# Altium PCB 风火轮（单面）.PcbDoc (part 4 of 4)
Units mil, origin at the board's own origin, x right, y up, seen from the top; angles counter-clockwise.
Board outline 3937.01 x 3937.01 mil, 2 copper layers (Top Layer, Bottom Layer); 108 components, 81 nets, 448 pads, 132 vias.
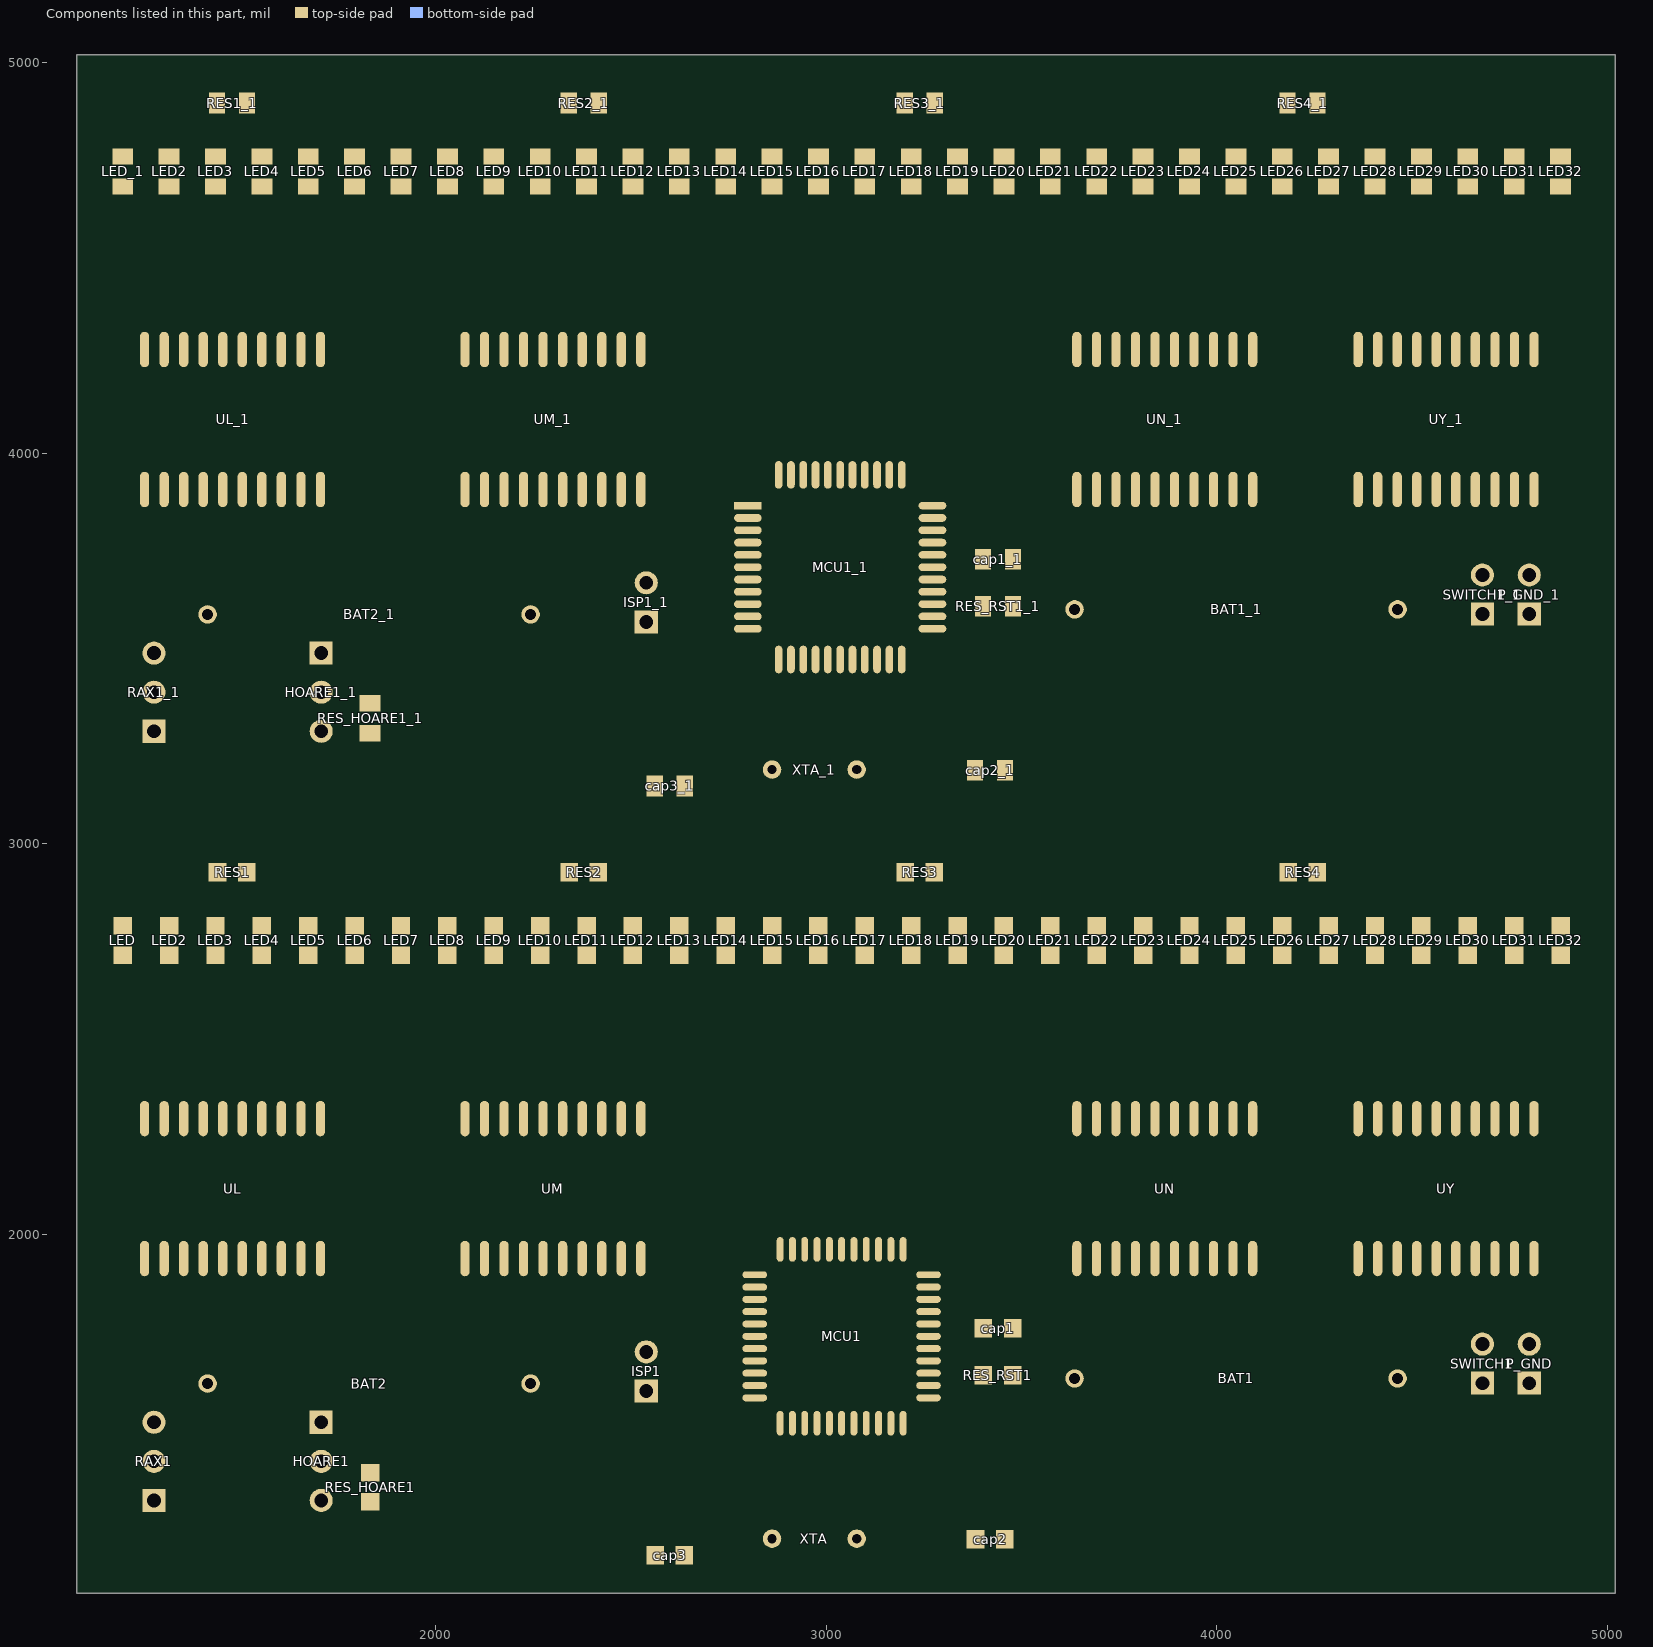
[diagram p4: the components of this part, seen from the top]

## Via types
v1: diameter 50, hole 28, Top Layer to Bottom Layer, 132 vias

## Nets (pads, with @x,y where several pads share a name; then routed paths per layer and width w, separated by ;. In a path a pad name is that pad's centre, name@x,y a point inside that pad or via, vN(x,y) a via of type N, cw(c..) or ccw(c..) an arc to the next point about the centre after c; other vN are vias at no path point) (continued)
copper on no net: (continued)
  Bottom Layer w20: 1387.62,3543.88 2138.69,3543.88 2225.93,3631.13 2294.05,3631.13 2362.14,3699.22 2362.14,3726.5 v1(2377.14,3741.5) ; 1401,3661.5 2281.62,3661.13 2332.14,3711.65 2332.14,3810.5 2326,3816.65 v1(2326,3825.5) ; 1435,3703.5 1444,3694.5 ; v1(1459,4011.5) 1459,4001.65 1455.86,3998.5 1508.86,3945.5 2182.57,3945.5 2272.57,3855.5 2272.57,3741.93 v1(2275,3739.5) ; v1(1504,4070.5) 1504,4079.5 v1@1509,4084.5 ; 1616.66,3492.5 1670.19,3438.98 1745.81,3438.98 1818.34,3511.5 2189.57,3511.5 v1@2190.57,3512.5 ; v1@1712,4360.5 v1(1712,4369.5) ; v1@1925,3771.5 v1@1925,3783.5 ; v1@2161,3732.5 v1(2171,3742.5) ; 2188,3694.5 2227.57,3734.08 v1(2227.57,3810.5) ; v1(2625,3958.5) 2733.87,4067.38 2900.13,4067.38 2987,3980.5 ; v1@2712,3913.5 v1(2715,3916.5) ; v1(2855.13,4022.38) 2937,3940.5 3668.07,3940.5 3892,3716.57 v1(3892,3663.5) ; v1(2887,3765.5) v1@2898,3746.5 ; v1(2896,3857.5) 2947.36,3857.5 2991.36,3901.5 3664.64,3901.5 3842,3724.14 3842,3628.5 v1(3838,3632.5) v1@3838,3654.5 ; v1(2950,3797.5) 3641.36,3797.5 3777.36,3661.5 v1@3792,3661.5 ; 3517,3746.5 3532,3765.5 v1(3546,3751.5) ; v1@3686,4044.5 v1(3692,4038.5) ; 3963,3980.5 v1(3992,3984.5) ; v1(4668.43,4053.78) v1@4668.43,4055.93 ; v1@4826,3426.5 4882,3482.5 ; v1@1474,4011.5 ccw(c1549.19,4011.5) 1496.02,3958.34 ; v1@1474,4011.5 ccw(c1549.19,4011.5) 1496.02,3958.34 ; v1@1474,4011.5 ccw(c1549.19,4011.5) 1496.02,3958.34 ; v1@1474,4011.5 ccw(c1549.19,4011.5) 1496.02,3958.34 ; 2150.89,3511.5 cw(c2150.89,3451.39) v1@2193.39,3493.9 ; 2150.89,3511.5 cw(c2150.89,3451.39) v1@2193.39,3493.9 ; 2150.89,3511.5 cw(c2150.89,3451.39) v1@2193.39,3493.9 ; 2150.89,3511.5 cw(c2150.89,3451.39) v1@2193.39,3493.9 ; v1@2216.96,3799.9 cw(c2191.36,3774.29) 2227.57,3774.29 ; v1@2216.96,3799.9 cw(c2191.36,3774.29) 2227.57,3774.29 ; v1@2216.96,3799.9 cw(c2191.36,3774.29) 2227.57,3774.29 ; v1@2216.96,3799.9 cw(c2191.36,3774.29) 2227.57,3774.29 ; 2227.57,3774.29 cw(c2263.78,3774.29) v1@2238.18,3799.9 ; 2227.57,3774.29 cw(c2263.78,3774.29) v1@2238.18,3799.9 ; 2227.57,3774.29 cw(c2263.78,3774.29) v1@2238.18,3799.9 ; 2227.57,3774.29 cw(c2263.78,3774.29) v1@2238.18,3799.9 ; v1@2264.39,3750.11 ccw(c2244.65,3769.85) 2272.57,3769.85 ; v1@2264.39,3750.11 ccw(c2244.65,3769.85) 2272.57,3769.85 ; v1@2264.39,3750.11 ccw(c2244.65,3769.85) 2272.57,3769.85 ; v1@2264.39,3750.11 ccw(c2244.65,3769.85) 2272.57,3769.85 ; 2272.57,3781.58 ccw(c2317.08,3781.58) v1@2285.61,3750.11 ; 2272.57,3781.58 ccw(c2317.08,3781.58) v1@2285.61,3750.11 ; 2272.57,3781.58 ccw(c2317.08,3781.58) v1@2285.61,3750.11 ; 2272.57,3781.58 ccw(c2317.08,3781.58) v1@2285.61,3750.11 ; v1@2315.39,3814.9 cw(c2274.96,3774.46) 2332.14,3774.46 ; v1@2315.39,3814.9 cw(c2274.96,3774.46) 2332.14,3774.46 ; v1@2315.39,3814.9 cw(c2274.96,3774.46) 2332.14,3774.46 ; v1@2315.39,3814.9 cw(c2274.96,3774.46) 2332.14,3774.46 ; 2362.14,3696.64 cw(c2395.69,3696.64) v1@2382.87,3727.64 ; 2362.14,3696.64 cw(c2395.69,3696.64) v1@2382.87,3727.64 ; 2362.14,3696.64 cw(c2395.69,3696.64) v1@2382.87,3727.64 ; 2362.14,3696.64 cw(c2395.69,3696.64) v1@2382.87,3727.64 ; v1@2625,3973.5 ccw(c2625,4009.72) 2650.61,3984.11 ; v1@2625,3973.5 ccw(c2625,4009.72) 2650.61,3984.11 ; v1@2625,3973.5 ccw(c2625,4009.72) 2650.61,3984.11 ; v1@2625,3973.5 ccw(c2625,4009.72) 2650.61,3984.11 ; v1@2640,3958.5 cw(c2676.21,3958.5) 2650.61,3984.11 ; v1@2640,3958.5 cw(c2676.21,3958.5) 2650.61,3984.11 ; v1@2640,3958.5 cw(c2676.21,3958.5) 2650.61,3984.11 ; v1@2640,3958.5 cw(c2676.21,3958.5) 2650.61,3984.11 ; v1@2855.13,4007.38 cw(c2855.13,3971.16) 2880.73,3996.77 ; v1@2855.13,4007.38 cw(c2855.13,3971.16) 2880.73,3996.77 ; v1@2855.13,4007.38 cw(c2855.13,3971.16) 2880.73,3996.77 ; v1@2855.13,4007.38 cw(c2855.13,3971.16) 2880.73,3996.77 ; v1@2870.13,4022.38 ccw(c2906.34,4022.38) 2880.73,3996.77 ; v1@2870.13,4022.38 ccw(c2906.34,4022.38) 2880.73,3996.77 ; v1@2870.13,4022.38 ccw(c2906.34,4022.38) 2880.73,3996.77 ; v1@2870.13,4022.38 ccw(c2906.34,4022.38) 2880.73,3996.77 ; v1@2906.61,3846.9 cw(c2932.21,3821.29) 2932.21,3857.5 ; v1@2906.61,3846.9 cw(c2932.21,3821.29) 2932.21,3857.5 ; v1@2906.61,3846.9 cw(c2932.21,3821.29) 2932.21,3857.5 ; v1@2906.61,3846.9 cw(c2932.21,3821.29) 2932.21,3857.5 ; v1@2906.61,3868.11 ccw(c2932.21,3893.72) 2932.21,3857.5 ; v1@2906.61,3868.11 ccw(c2932.21,3893.72) 2932.21,3857.5 ; v1@2906.61,3868.11 ccw(c2932.21,3893.72) 2932.21,3857.5 ; v1@2906.61,3868.11 ccw(c2932.21,3893.72) 2932.21,3857.5 ; v1@2960.61,3786.9 cw(c2986.21,3761.29) 2986.21,3797.5 ; v1@2960.61,3786.9 cw(c2986.21,3761.29) 2986.21,3797.5 ; v1@2960.61,3786.9 cw(c2986.21,3761.29) 2986.21,3797.5 ; v1@2960.61,3786.9 cw(c2986.21,3761.29) 2986.21,3797.5 ; v1@2960.61,3808.11 ccw(c2986.21,3833.72) 2986.21,3797.5 ; v1@2960.61,3808.11 ccw(c2986.21,3833.72) 2986.21,3797.5 ; v1@2960.61,3808.11 ccw(c2986.21,3833.72) 2986.21,3797.5 ; v1@2960.61,3808.11 ccw(c2986.21,3833.72) 2986.21,3797.5 ; 3748.47,3690.39 ccw(c3782,3723.92) v1@3782,3676.5 ; 3748.47,3690.39 ccw(c3782,3723.92) v1@3782,3676.5 ; 3748.47,3690.39 ccw(c3782,3723.92) v1@3782,3676.5 ; 3748.47,3690.39 ccw(c3782,3723.92) v1@3782,3676.5 ; 3759.67,3679.19 cw(c3741.99,3661.5) v1@3767,3661.5 ; 3759.67,3679.19 cw(c3741.99,3661.5) v1@3767,3661.5 ; 3759.67,3679.19 cw(c3741.99,3661.5) v1@3767,3661.5 ; 3759.67,3679.19 cw(c3741.99,3661.5) v1@3767,3661.5 ; v1@3827.39,3643.11 ccw(c3792.13,3678.37) 3842,3678.37 ; v1@3827.39,3643.11 ccw(c3792.13,3678.37) 3842,3678.37 ; v1@3827.39,3643.11 ccw(c3792.13,3678.37) 3842,3678.37 ; v1@3827.39,3643.11 ccw(c3792.13,3678.37) 3842,3678.37 ; 3842,3659.06 ccw(c3864.56,3659.06) v1@3848.61,3643.11 ; 3842,3659.06 ccw(c3864.56,3659.06) v1@3848.61,3643.11 ; 3842,3659.06 ccw(c3864.56,3659.06) v1@3848.61,3643.11 ; 3842,3659.06 ccw(c3864.56,3659.06) v1@3848.61,3643.11 ; v1@3881.39,3674.11 ccw(c3855.79,3699.72) 3892,3699.72 ; v1@3881.39,3674.11 ccw(c3855.79,3699.72) 3892,3699.72 ; v1@3881.39,3674.11 ccw(c3855.79,3699.72) 3892,3699.72 ; v1@3881.39,3674.11 ccw(c3855.79,3699.72) 3892,3699.72 ; 3892,3699.72 ccw(c3928.21,3699.72) v1@3902.61,3674.11 ; 3892,3699.72 ccw(c3928.21,3699.72) v1@3902.61,3674.11 ; 3892,3699.72 ccw(c3928.21,3699.72) v1@3902.61,3674.11 ; 3892,3699.72 ccw(c3928.21,3699.72) v1@3902.61,3674.11 ; v1@4816,3446.5 ccw(c4816,3518.93) 4867.21,3467.72 ; v1@4816,3446.5 ccw(c4816,3518.93) 4867.21,3467.72 ; v1@4816,3446.5 ccw(c4816,3518.93) 4867.21,3467.72 ; v1@4816,3446.5 ccw(c4816,3518.93) 4867.21,3467.72
  Bottom Layer w24: 1444,3694.5 2188,3694.5
  Bottom Layer w25: 1708,3288.5 1708,3213.5 1824,3097.5 ; 1695.96,3276.46 cw(c1666.89,3247.4) 1708,3247.4 ; 1695.96,3276.46 cw(c1666.89,3247.4) 1708,3247.4 ; 1695.96,3276.46 cw(c1666.89,3247.4) 1708,3247.4 ; 1695.96,3276.46 cw(c1666.89,3247.4) 1708,3247.4 ; 1708,3247.4 cw(c1749.11,3247.4) 1720.04,3276.46 ; 1708,3247.4 cw(c1749.11,3247.4) 1720.04,3276.46 ; 1708,3247.4 cw(c1749.11,3247.4) 1720.04,3276.46 ; 1708,3247.4 cw(c1749.11,3247.4) 1720.04,3276.46
  Bottom Layer w30: 1114,4233.5 1114,3250.5 1261,3103.5 v1(1695,3103.5) ; 1119.29,4238.22 1119.29,4239.64 1249.15,4369.5 v1@1692.97,4369.5 ; 1300,4074.5 1300,3838.5 1435,3703.5 ; 1302,4074.5 1314,4086.5 v1(1407,4086.5) ; v1(1359,4018.5) 1359,4002.5 1355,3998.5 1621,3732.5 v1@2161,3732.5 ; 1387.62,3543.88 1196,3735.5 1196,4164.5 1311,4279.5 1519.43,4279.5 1556.71,4242.22 1556.71,3998.5 v1(1559,3998.5) ; 1401,3661.5 1246,3816.5 1246,4143.5 1342,4239.5 1455,4239.5 1504,4190.5 v1@1504,4079.5 ; v1(1608,4038.5) 1608,4285.5 1566,4327.5 1276,4327.5 1156,4207.5 1156,3701.5 1365,3492.5 1616.66,3492.5 ; 1708,3388.5 2386.43,3388.5 2534.43,3240.5 3377.57,3240.5 3569.57,3432.5 4226.24,3432.5 4536.77,3743.03 4702.59,3743.03 4757.11,3688.5 ; v1@1741,4029.5 1776,3994.5 2282,3994.5 v1(2502,3774.5) 2502,3995.5 2711,4204.5 3983.46,4204.5 v1@4052.28,4103.78 ; 1824,3097.5 4189,3097.5 4680,3588.5 ; v1@1925,3783.5 v1(1925,3894.5) ; v1(1926,4045.5) 2222,4045.5 v1(2528,4351.5) ; v1(2064,4388.5) v1@2064,4966.5 ; 2244,3587.5 2551,3280.5 3361,3280.5 3636.23,3555.73 3636.23,3600.5 ; v1(2416,3206.5) 2446,3176.5 v1(2739,3176.5) ; v1@2443,3506.5 2551.5,3398 2736.5,3398 2835,3496.5 2835,3561.5 2962,3688.5 3063,3688.5 3084,3667.5 v1(3084,3570.5) ; v1(2591,3834.5) 2729,3834.5 2862,3701.5 ; v1@2712,3913.5 2698,3899.5 2600,3899.5 2564,3935.5 2564,3976.5 2689.87,4102.38 3962.77,4102.38 4140.64,3924.5 4537,3924.5 v1@4671.28,4058.78 ; v1(2789,3333.5) 2940,3333.5 3029,3422.5 3029,3620.5 v1(3021,3628.5) ; v1@2898,3746.5 3517,3746.5 ; 2987,3980.5 3963,3980.5 ; v1(3010,3856.5) 3646,3856.5 v1(3742,3760.5) ; v1(3035,4044.5) v1@3686,4044.5 ; v1(3166,3584.5) 3364,3386.5 3376,3386.5 ; v1(3545,3315.5) v1(4146,3315.5) ; v1@3576,4329.5 v1@3576,4979.5 ; v1(3577,4979.5) 3577,4985.5 v1@3581,4985.5 ; v1(3599,3368.5) v1(4007,3368.5) ; v1(3992,3984.5) 4124,3877.5 4577,3877.5 v1(4711,4011.5) ; v1@4062,4113.5 4680.2,4113.5 4756,4037.7 ; v1(4092,4356.5) 4189,4356.5 4382,4163.5 4851,4163.5 4851,4164.5 4882,4133.5 4882,3482.5 ; v1@4266,4971.5 4266,4393.5 v1@4353,4306.5 ; v1(4825,4373.5) 4947,4251.5 4947,3448.5 v1@4826,3327.5 ; v1@1369,4018.5 ccw(c1451.08,4018.5) 1393.04,3960.46 ; v1@1369,4018.5 ccw(c1451.08,4018.5) 1393.04,3960.46 ; v1@1369,4018.5 ccw(c1451.08,4018.5) 1393.04,3960.46 ; v1@1369,4018.5 ccw(c1451.08,4018.5) 1393.04,3960.46 ; 1556.71,4028.16 ccw(c1588.66,4028.16) v1@1566.07,4005.58 ; 1556.71,4028.16 ccw(c1588.66,4028.16) v1@1566.07,4005.58 ; 1556.71,4028.16 ccw(c1588.66,4028.16) v1@1566.07,4005.58 ; 1556.71,4028.16 ccw(c1588.66,4028.16) v1@1566.07,4005.58 ; 1718.27,3378.23 cw(c1743.07,3353.43) 1743.07,3388.5 ; 1718.27,3378.23 cw(c1743.07,3353.43) 1743.07,3388.5 ; 1718.27,3378.23 cw(c1743.07,3353.43) 1743.07,3388.5 ; 1718.27,3378.23 cw(c1743.07,3353.43) 1743.07,3388.5 ; 1718.27,3398.78 ccw(c1743.07,3423.58) 1743.07,3388.5 ; 1718.27,3398.78 ccw(c1743.07,3423.58) 1743.07,3388.5 ; 1718.27,3398.78 ccw(c1743.07,3423.58) 1743.07,3388.5 ; 1718.27,3398.78 ccw(c1743.07,3423.58) 1743.07,3388.5 ; v1@1739,4017.5 cw(c1739,3983.7) 1762.9,4007.6 ; v1@1739,4017.5 cw(c1739,3983.7) 1762.9,4007.6 ; v1@1739,4017.5 cw(c1739,3983.7) 1762.9,4007.6 ; v1@1739,4017.5 cw(c1739,3983.7) 1762.9,4007.6 ; v1@1913.93,3790.58 ccw(c1887.2,3817.3) 1925,3817.3 ; v1@1913.93,3790.58 ccw(c1887.2,3817.3) 1925,3817.3 ; v1@1913.93,3790.58 ccw(c1887.2,3817.3) 1925,3817.3 ; v1@1913.93,3790.58 ccw(c1887.2,3817.3) 1925,3817.3 ; v1@2052.93,4959.43 cw(c2026.2,4932.7) 2064,4932.7 ; v1@2052.93,4959.43 cw(c2026.2,4932.7) 2064,4932.7 ; v1@2052.93,4959.43 cw(c2026.2,4932.7) 2064,4932.7 ; v1@2052.93,4959.43 cw(c2026.2,4932.7) 2064,4932.7 ; 2122.72,3732.5 ccw(c2122.72,3790.79) v1@2163.93,3749.58 ; 2122.72,3732.5 ccw(c2122.72,3790.79) v1@2163.93,3749.58 ; 2122.72,3732.5 ccw(c2122.72,3790.79) v1@2163.93,3749.58 ; 2122.72,3732.5 ccw(c2122.72,3790.79) v1@2163.93,3749.58 ; v1@2433,3496.5 cw(c2433,3448.22) 2467.14,3482.36 ; v1@2433,3496.5 cw(c2433,3448.22) 2467.14,3482.36 ; v1@2433,3496.5 cw(c2433,3448.22) 2467.14,3482.36 ; v1@2433,3496.5 cw(c2433,3448.22) 2467.14,3482.36 ; 2649.82,3899.5 ccw(c2649.82,3981.69) v1@2707.93,3923.58 ; 2649.82,3899.5 ccw(c2649.82,3981.69) v1@2707.93,3923.58 ; 2649.82,3899.5 ccw(c2649.82,3981.69) v1@2707.93,3923.58 ; 2649.82,3899.5 ccw(c2649.82,3981.69) v1@2707.93,3923.58 ; 2841.91,3721.6 ccw(c2888,3767.69) v1@2888,3702.5 ; 2841.91,3721.6 ccw(c2888,3767.69) v1@2888,3702.5 ; 2841.91,3721.6 ccw(c2888,3767.69) v1@2888,3702.5 ; 2841.91,3721.6 ccw(c2888,3767.69) v1@2888,3702.5 ; v1@2894.07,3772.58 ccw(c2957.01,3835.52) 2957.01,3746.5 ; v1@2894.07,3772.58 ccw(c2957.01,3835.52) 2957.01,3746.5 ; v1@2894.07,3772.58 ccw(c2957.01,3835.52) 2957.01,3746.5 ; v1@2894.07,3772.58 ccw(c2957.01,3835.52) 2957.01,3746.5 ; v1@3013.93,3621.43 cw(c2977.54,3585.05) 3029,3585.05 ; v1@3013.93,3621.43 cw(c2977.54,3585.05) 3029,3585.05 ; v1@3013.93,3621.43 cw(c2977.54,3585.05) 3029,3585.05 ; v1@3013.93,3621.43 cw(c2977.54,3585.05) 3029,3585.05 ; 3355.51,3394.99 ccw(c3376,3415.47) 3376,3386.5 ; 3355.51,3394.99 ccw(c3376,3415.47) 3376,3386.5 ; 3355.51,3394.99 ccw(c3376,3415.47) 3376,3386.5 ; 3509.79,3746.5 ccw(c3509.79,3787.72) v1@3538.93,3758.58 ; 3509.79,3746.5 ccw(c3509.79,3787.72) v1@3538.93,3758.58 ; 3509.79,3746.5 ccw(c3509.79,3787.72) v1@3538.93,3758.58 ; 3509.79,3746.5 ccw(c3509.79,3787.72) v1@3538.93,3758.58 ; v1@3565.93,4336.58 ccw(c3541.62,4360.89) 3576,4360.89 ; v1@3565.93,4336.58 ccw(c3541.62,4360.89) 3576,4360.89 ; v1@3565.93,4336.58 ccw(c3541.62,4360.89) 3576,4360.89 ; v1@3565.93,4336.58 ccw(c3541.62,4360.89) 3576,4360.89 ; 3576,4952.95 cw(c3603.56,4952.95) v1@3584.07,4972.43 ; 3576,4952.95 cw(c3603.56,4952.95) v1@3584.07,4972.43 ; 3576,4952.95 cw(c3603.56,4952.95) v1@3584.07,4972.43 ; 3576,4952.95 cw(c3603.56,4952.95) v1@3584.07,4972.43 ; 3653.37,4044.5 cw(c3653.37,3999.88) v1@3684.93,4031.43 ; 3653.37,4044.5 cw(c3653.37,3999.88) v1@3684.93,4031.43 ; 3653.37,4044.5 cw(c3653.37,3999.88) v1@3684.93,4031.43 ; 3653.37,4044.5 cw(c3653.37,3999.88) v1@3684.93,4031.43 ; 3958.2,3980.5 ccw(c3958.2,4018.3) v1@3984.93,3991.58 ; 3958.2,3980.5 ccw(c3958.2,4018.3) v1@3984.93,3991.58 ; 3958.2,3980.5 ccw(c3958.2,4018.3) v1@3984.93,3991.58 ; 3958.2,3980.5 ccw(c3958.2,4018.3) v1@3984.93,3991.58 ; 4027.7,4139.76 cw(c3983.16,4109.33) v1@4036.17,4099.35 ; 4027.7,4139.76 cw(c3983.16,4109.33) v1@4036.17,4099.35 ; 4027.7,4139.76 cw(c3983.16,4109.33) v1@4036.17,4099.35 ; 4027.7,4139.76 cw(c3983.16,4109.33) v1@4036.17,4099.35 ; v1@4053.07,4090.43 cw(c4108.77,4034.73) 4108.77,4113.5 ; v1@4053.07,4090.43 cw(c4108.77,4034.73) 4108.77,4113.5 ; v1@4053.07,4090.43 cw(c4108.77,4034.73) 4108.77,4113.5 ; v1@4053.07,4090.43 cw(c4108.77,4034.73) 4108.77,4113.5 ; v1@4253.93,4971.43 cw(c4224.79,4942.29) 4266,4942.29 ; v1@4253.93,4971.43 cw(c4224.79,4942.29) 4266,4942.29 ; v1@4253.93,4971.43 cw(c4224.79,4942.29) 4266,4942.29 ; v1@4253.93,4971.43 cw(c4224.79,4942.29) 4266,4942.29 ; 4331.1,4328.4 ccw(c4355,4352.3) v1@4355,4318.5 ; 4331.1,4328.4 ccw(c4355,4352.3) v1@4355,4318.5 ; 4331.1,4328.4 ccw(c4355,4352.3) v1@4355,4318.5 ; 4331.1,4328.4 ccw(c4355,4352.3) v1@4355,4318.5 ; 4647.69,4035.19 cw(c4668.43,4014.46) v1@4668.43,4043.78 ; 4647.69,4035.19 cw(c4668.43,4014.46) v1@4668.43,4043.78 ; 4647.69,4035.19 cw(c4668.43,4014.46) v1@4668.43,4043.78 ; 4647.69,4035.19 cw(c4668.43,4014.46) v1@4668.43,4043.78 ; 4655.2,3563.7 ccw(c4630.4,3588.5) 4665.47,3588.5 ; 4655.2,3563.7 cw(c4680,3538.9) 4680,3573.98 ; 4655.2,3563.7 ccw(c4630.4,3588.5) 4665.47,3588.5 ; 4655.2,3563.7 cw(c4680,3538.9) 4680,3573.98 ; 4655.2,3563.7 ccw(c4630.4,3588.5) 4665.47,3588.5 ; 4655.2,3563.7 cw(c4680,3538.9) 4680,3573.98 ; 4655.2,3563.7 ccw(c4630.4,3588.5) 4665.47,3588.5 ; 4655.2,3563.7 cw(c4680,3538.9) 4680,3573.98 ; 4724.03,3721.59 ccw(c4776.49,3774.04) 4796.15,3702.51 ; 4724.03,3721.59 ccw(c4776.49,3774.04) 4796.15,3702.51 ; 4724.03,3721.59 ccw(c4776.49,3774.04) 4796.15,3702.51 ; 4724.03,3721.59 ccw(c4776.49,3774.04) 4796.15,3702.51 ; 4746.01,4047.69 cw(c4709.82,4011.5) v1@4761,4011.5 ; 4746.01,4047.69 cw(c4709.82,4011.5) v1@4761,4011.5 ; 4746.01,4047.69 cw(c4709.82,4011.5) v1@4761,4011.5 ; 4746.01,4047.69 cw(c4709.82,4011.5) v1@4761,4011.5 ; 4760.5,3685.12 ccw(c4792.21,3716.83) 4804.1,3673.58 ; 4760.5,3685.12 ccw(c4792.21,3716.83) 4804.1,3673.58 ; 4760.5,3685.12 ccw(c4792.21,3716.83) 4804.1,3673.58 ; 4760.5,3685.12 ccw(c4792.21,3716.83) 4804.1,3673.58 ; v1@4816,3338.5 ccw(c4816,3389.2) 4851.85,3353.35 ; v1@4816,3338.5 ccw(c4816,3389.2) 4851.85,3353.35 ; v1@4816,3338.5 ccw(c4816,3389.2) 4851.85,3353.35 ; v1@4816,3338.5 ccw(c4816,3389.2) 4851.85,3353.35
  other v1: 3374,3360 3679.85,3432.5 2123,3810.5 4771,4011.5 4355,4308.5 2060,4966.5 4261,4978.5

## Keep-outs
Keep-Out Layer:
  lines w10: 1082.68,3051.18 1082.68,1082.68 5019.69,1082.68 5019.69,3051.18 ; 1082.68,3051.18 1082.68,5019.69 5019.69,5019.69 5019.69,3051.18 ; 1082.68,3051.18 5019.69,3051.18

## Silkscreen, mask and mechanical layers (free items; w line width, h text height)
Top Overlay:
  lines w20: 1082.68,3056.36 5019.69,3056.36
  text "DDK" at 4689,4912.5 h100
  text "DDK" at 4689,2944 h100

## Text inside footprints (layer, text, board x,y; h text height)
BAT1: Bottom Overlay "+" at 4488,1697 h60 r357.27
BAT1_1: Bottom Overlay "+" at 4488,3665.5 h60 r357.27
BAT2: Bottom Overlay "+" at 2269,1684 h60 r357.27
BAT2_1: Bottom Overlay "+" at 2269,3652.5 h60 r357.27